# Allegro board autohood_teamschematic_v3.1.brd
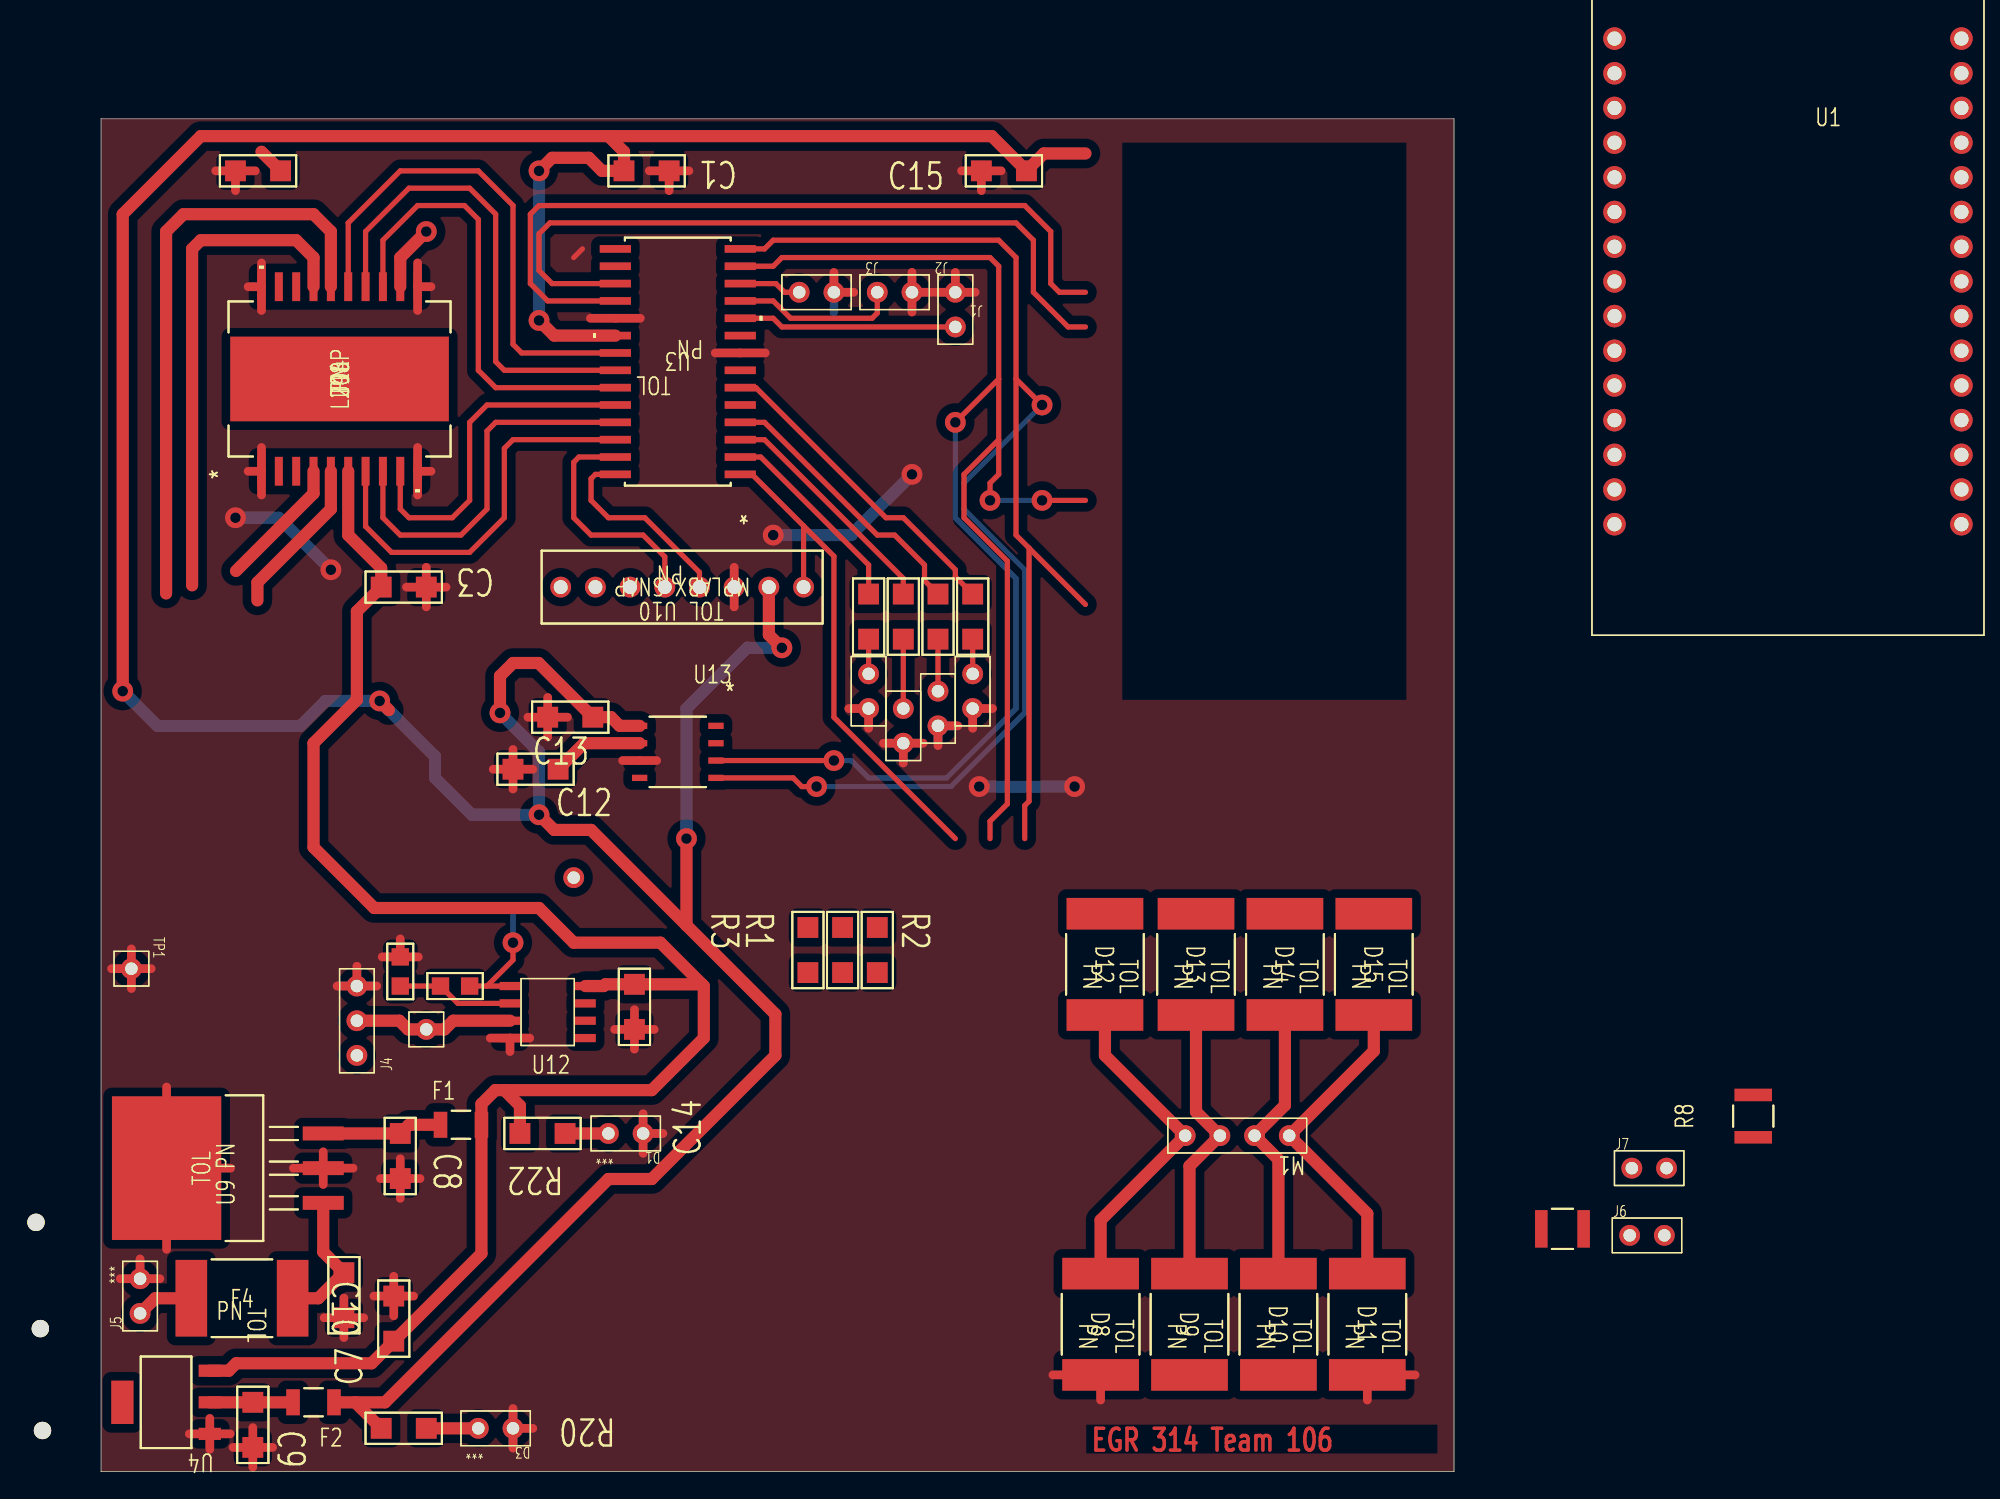
[diagram p0: board, top side]
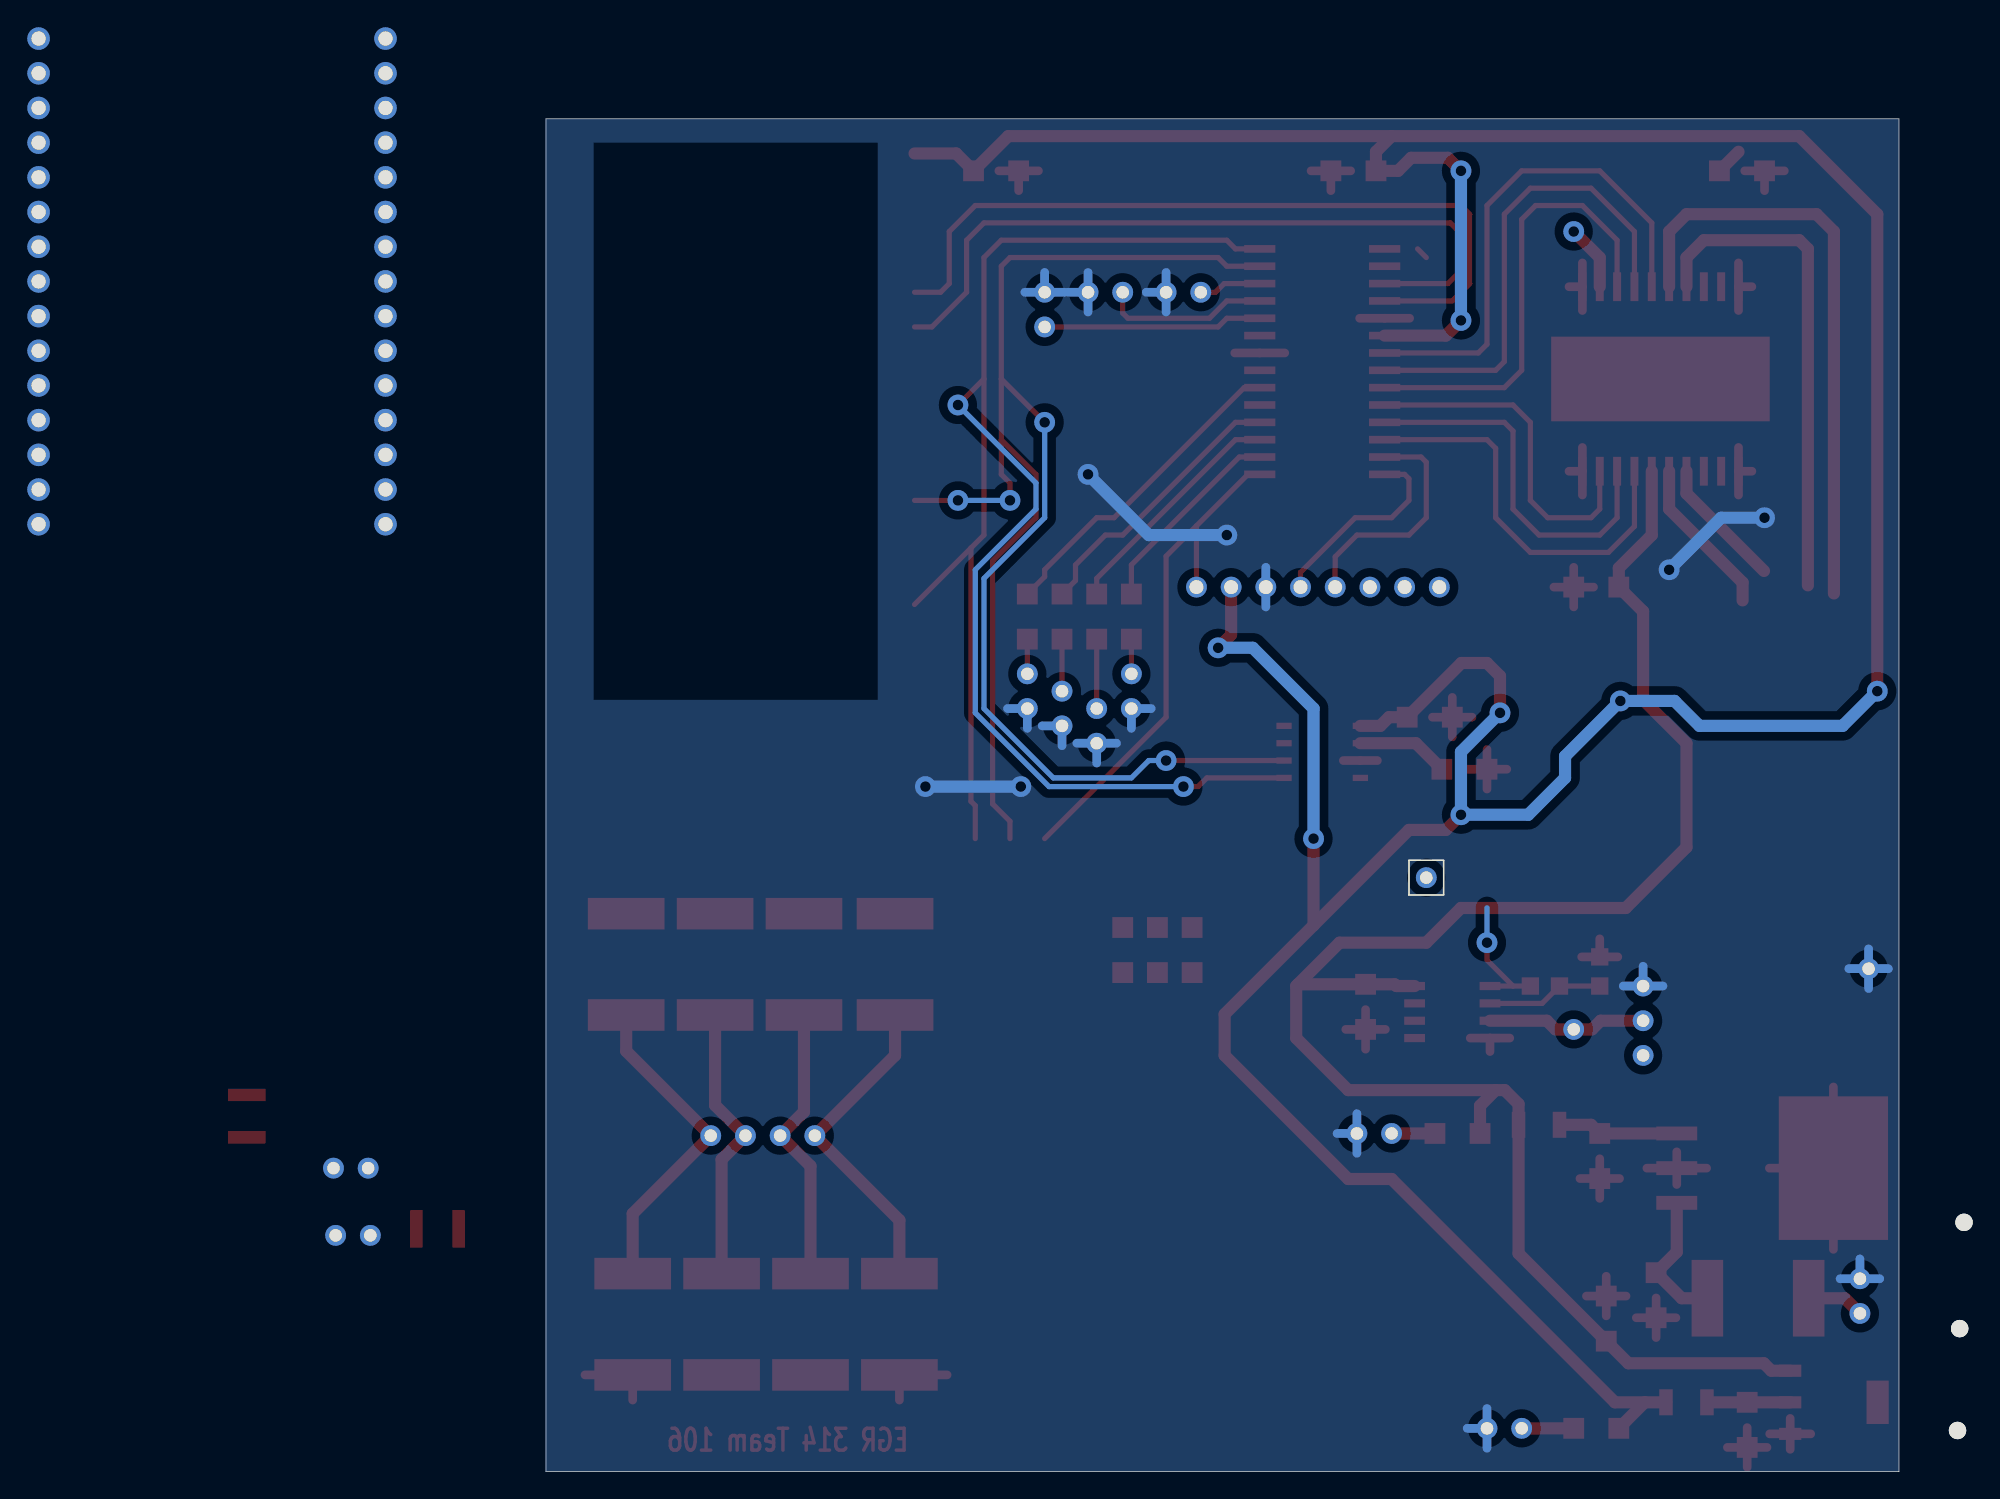
[diagram p1: board, bottom side, seen from below]

Outline 99.06 x 99.06 mm; copper layers: TOP, BOTTOM. Coordinates in mm from the lower left corner of the outline.
Outline path: 0,99.06 0,0 99.06,0 99.06,99.06 0,99.06

## Design rules (mm)
constraint set DEFAULT: min track width 0.127

## Placement (name value [footprint] x y rotation side)
C1  1 uF  [SMC1206]  41.59 95.25 180 top
C3  1 uF  [SMC1206]  23.81 64.77 180 top
C4  1 uF  [SMC1206]  9.84 95.25 0 top
C7  1 uF  [SMC1206]  17.78 11.27 90 top
C8  1 uF  [SMC1206]  21.91 24.76 270 top
C9  1 uF  [SMC1206]  11.11 5.08 270 top
C10  1 uF  [SMC1206]  21.43 12.86 270 top
C12  0.1uF  [SMC1206]  30.16 51.43 0 top
C13  0.22uF  [SMC1206]  32.7 55.24 0 top
C14  1 uF  [SMC1206]  39.05 32.38 90 top
C15  1 uF  [SMC1206]  64.45 95.25 0 top
D1  LED  [JUMPER2]  39.69 24.76 180 top
D2  LED  [JUMPER2]  63.82 55.88 90 top
D3  LED  [JUMPER2]  30.16 3.17 180 top
D4  LED  [JUMPER2]  56.2 55.88 90 top
D5  LED  [JUMPER2]  58.74 53.34 90 top
D7  LED  [JUMPER2]  61.28 54.61 90 top
D8  DIODE  [0ZCF_BEL]  73.18 10.79 270 top
D9  DIODE  [0ZCF_BEL]  79.69 10.79 270 top
D10  DIODE  [0ZCF_BEL]  86.2 10.79 270 top
D11  DIODE  [0ZCF_BEL]  92.71 10.79 270 top
D12  DIODE  [0ZCF_BEL]  73.5 37.15 270 top
D13  DIODE  [0ZCF_BEL]  80.17 37.15 270 top
D14  DIODE  [0ZCF_BEL]  86.68 37.15 270 top
D15  DIODE  [0ZCF_BEL]  93.19 37.15 270 top
F1  1.5A PTC Fuse  [0ZCJ_BEL]  26.35 25.4 0 top
F2  1.5A PTC Fuse  [0ZCJ_BEL]  15.56 5.08 0 top
F4  2.5A PTC Fuse  [0ZCF_BEL]  10.32 12.7 0 top
J1  CON2  [JUMPER2]  62.55 86.36 270 top
J2  CON2  [JUMPER2]  59.37 86.36 180 top
J3  CON2  [JUMPER2]  53.66 86.36 180 top
J4  CON3  [JUMPER3]  18.73 30.48 90 top
J5  CON2  [JUMPER2]  2.86 11.59 90 top
J6  Header to E-Button  [JUMPER2]  111.92 17.3 0 top
J7  Header to DEBUG-Button  [JUMPER2]  112.08 22.22 0 top
M1  42M100B  [JUMPER4]  87 24.61 180 top
NOREF  -  [unnamed]  -4.44 10.48 0 top
NOREF#2  -  [unnamed]  -4.76 18.26 0 top
NOREF#3  -  [unnamed]  -4.29 3.02 0 top
R1  10k Ohm  [SMC1206]  51.75 39.85 270 top
R2  4.7k Ohm  [SMC1206]  56.83 39.85 270 top
R3  4.7k Ohm  [SMC1206]  54.29 39.85 270 top
R8  10k Ohm  [RES_RN73R2E_KOA-M]  120.97 26.03 90 top
R10  220 Ohm  [SMC1206]  58.74 60.96 90 top
R11  100 Ohm  [SMC0805]  26.99 35.56 180 top
R12  51.1 Ohm  [SMC0805]  21.91 35.56 90 top
R17  220 Ohm  [SMC1206]  61.28 60.96 90 top
R18  220 Ohm  [SMC1206]  56.2 60.96 90 top
R19  220 Ohm  [SMC1206]  63.82 60.96 90 top
R20  220 Ohm  [SMC1206]  23.81 3.17 180 top
R22  220 Ohm  [SMC1206]  33.97 24.76 180 top
R23  10k Ohm  [RES_RN73R2E_KOA-M]  107 17.78 0 top
TP1  TEST POINT  [JUMPER1]  2.22 36.83 0 top
TP2  TEST POINT  [JUMPER1]  23.81 32.38 0 top
TP3  TEST POINT  [JUMPER1]  34.61 43.5 180 bottom
U1  ESP32 DEVKIT V1 - DOIT  [ESP32]  123.51 87.15 0 top
U3  PIC18LF26K40-E/SO  [SOIC28-W_MC_MCH-M]  42.23 81.28 180 top
U4  ADP3339AKCZ-3-3-RL  [SOT230P700X180-4N]  4.76 5.08 180 top
U9  LM340T-5/LF01  [SOT_0T-5P0LF01_TEX-M]  7.3 22.22 90 top
U10  MPLABX SNAP  [CONN_PXC08D_SUL]  51.44 63.5 180 top
U12  NCS21911  [NCS21912DR2G]  32.7 33.65 0 top
U13  HIH6130  [IC8_HIH6130-021-001_HNW]  42.23 52.7 0 top
U14  L298P  [POWERSO-20_STM-M]  17.46 80.01 90 top

## Library data of the parts
C1 C3 C4 C7-C10 C12-C15 = C
D1 D3 = LED: User Part Number: ***
D2 D4 D5 D7 = LED
D8-D15 = DIODE: User Part Number: PN; Tolerance: TOL
F1 F2 = FUSE THERMAL
F4 = FUSE THERMAL: User Part Number: PN; Tolerance: TOL
J1-J3 = CON2
J4 = CON3
J5 = CON2: User Part Number: ***
J6 J7 = HEADER 2
M1 = 42M100B
R1-R3 R8 R10-R12 R17-R20 R22 = R
R23 = RESISTOR
TP1-TP3 = TEST POINT
U1 = ESP32 DEVKIT V1 - DOIT
U3 = PIC18F26K40-E/SO: User Part Number: PN; Tolerance: TOL
U4 = ADP3339AKCZ
U9 = LM340T-5-LF01: User Part Number: PN; Tolerance: TOL
U10 = SNAP_CONNECTOR: User Part Number: PN; Tolerance: TOL
U12 = NCS21911
U13 = HIH6130
U14 = L298P: User Part Number: PN; Tolerance: TOL

## Footprints (pads in the part's own frame, mm; a bottom-side part is the same pattern mirrored in y, then rotated)
0ZCF_BEL
  rect 2.311x5.613 smd: 1(-3.708,0) 2(3.708,0)
0ZCJ_BEL
  rect 0.991x1.905 smd: 1(-1.499,0) 2(1.499,0)
CONN_PXC08D_SUL
  round 1.524 hole 1.016: 1(0,-1.27) 2(2.54,-1.27) 3(5.08,-1.27) 4(7.62,-1.27) 5(10.16,-1.27) 6(12.7,-1.27) 7(15.24,-1.27) 8(17.78,-1.27)
ESP32
  round 1.651 hole 1.041: 1(-12.7,17.78) 2(-12.7,15.24) 3(-12.7,12.7) 4(-12.7,10.16) 5(-12.7,7.62) 6(-12.7,5.08) 7(-12.7,2.54) 8(-12.7,0) 9(-12.7,-2.54) 10(-12.7,-5.08) 11(-12.7,-7.62) 12(-12.7,-10.16) 13(-12.7,-12.7) 14(-12.7,-15.24) 15(-12.7,-17.78) 16(12.7,17.78) 17(12.7,-15.24) 18(12.7,-12.7) 19(12.7,-10.16) 20(12.7,-7.62) 21(12.7,-5.08) 22(12.7,-2.54) 23(12.7,0) 24(12.7,2.54) 25(12.7,5.08) 26(12.7,7.62) 27(12.7,10.16) 28(12.7,12.7) 29(12.7,15.24) 30(12.7,-17.78)
IC8_HIH6130-021-001_HNW
  rect 1.118x0.457 smd: 1(-2.794,1.905) 2(-2.794,0.635) 3(-2.794,-0.635) 4(-2.794,-1.905) 5(2.794,-1.905) 6(2.794,-0.635) 7(2.794,0.635) 8(2.794,1.905)
JUMPER1
  round 1.524 hole 0.914: 1(0,0)
JUMPER2
  round 1.524 hole 0.914: 1(0,0) 2(2.54,0)
JUMPER3
  round 1.524 hole 0.914: 1(0,0) 2(2.54,0) 3(5.08,0)
JUMPER4
  round 1.524 hole 0.914: 1(0,0) 2(2.54,0) 3(5.08,0) 4(7.62,0)
NCS21912DR2G
  rect 1.52x0.6 smd: 1(-2.76,1.905) 2(-2.76,0.635) 3(-2.76,-0.635) 4(-2.76,-1.905) 5(2.76,-1.905) 6(2.76,-0.635) 7(2.76,0.635) 8(2.76,1.905)
POWERSO-20_STM-M
  rect 2.108x0.584 smd: 1(-6.756,5.715) 2(-6.756,4.445) 3(-6.756,3.175) 4(-6.756,1.905) 5(-6.756,0.635) 6(-6.756,-0.635) 7(-6.756,-1.905) 8(-6.756,-3.175) 9(-6.756,-4.445) 10(-6.756,-5.715) 11(6.756,-5.715) 12(6.756,-4.445) 13(6.756,-3.175) 14(6.756,-1.905) 15(6.756,-0.635) 16(6.756,0.635) 17(6.756,1.905) 18(6.756,3.175) 19(6.756,4.445) 20(6.756,5.715)
  rect 6.198x16.002 smd: 21(0,0)
RES_RN73R2E_KOA-M
  rect 0.914x2.743 smd: 1(-1.549,0) 2(1.549,0)
SMC0805
  rect 1.27x1.27 smd: 1(0,0) 2(2.134,0)
SMC1206
  rect 1.524x1.524 smd: 1(0,0) 2(3.302,0)
SOIC28-W_MC_MCH-M
  rect 2.286x0.559 smd: 1(-4.572,8.255) 2(-4.572,6.985) 3(-4.572,5.715) 4(-4.572,4.445) 5(-4.572,3.175) 6(-4.572,1.905) 7(-4.572,0.635) 8(-4.572,-0.635) 9(-4.572,-1.905) 10(-4.572,-3.175) 11(-4.572,-4.445) 12(-4.572,-5.715) 13(-4.572,-6.985) 14(-4.572,-8.255) 15(4.572,-8.255) 16(4.572,-6.985) 17(4.572,-5.715) 18(4.572,-4.445) 19(4.572,-3.175) 20(4.572,-1.905) 21(4.572,-0.635) 22(4.572,0.635) 23(4.572,1.905) 24(4.572,3.175) 25(4.572,4.445) 26(4.572,5.715) 27(4.572,6.985) 28(4.572,8.255)
SOT230P700X180-4N
  rect 1.626x0.889 smd: 1(-3.2,2.311) 2(-3.2,0) 3(-3.2,-2.311)
  rect 1.626x3.175 smd: 4(3.2,0)
SOT_0T-5P0LF01_TEX-M
  rect 1.016x2.997 smd: 1(-2.54,-8.966) 2(0,-8.966) 3(2.54,-8.966)
  rect 10.516x8.001 smd: 4(0,2.502)
unnamed
  round 1.27 hole 3.962 unplated: (0,0)

## Nets
3V3: C1.2 C13.2 C15.2 F2.2 J7.1 R1.2 R2.2 R3.2 R8.2 R20.2 R23.1 U1.1 U3.20 U10.2(VDD) U13.1
3V3_FUSE: C9.1 F2.1 U4.2(OUT1)
5V: C3.2 C4.2 C10.2 C14.2 D12.1(K) D13.1(K) D14.1(K) D15.1(K) F1.2 R22.2 U4.3 U12.8 U14.6 U14.12(VSS)
5V_FUSE: C8.1 F1.1 U9.3(OUT)
9V: C7.2 F4.2 J4.1 U9.1
GND: C1.1 C3.1 C4.1 C7.1 C8.2 C9.2 C10.1 C12.1 C13.1 C14.1 C15.1 D1.1(CATHODE) D2.1(CATHODE) D3.1(CATHODE) D4.1(CATHODE) D5.1(CATHODE) D7.1(CATHODE) D8.2 D9.2 D10.2 D11.2 J1.1 J2.1 J3.1 J4.3 J5.2 J6.2 R8.1 R12.2 TP1.1 U1.2 U1.17 U3.8 U3.19(VSS1) U4.1 U9.2 U9.4 U10.3 U12.4(VSS) U13.3(VSS) U14.1 U14.10 U14.11 U14.20
AMP: R11.1 TP3.1 U3.2 U12.1
ANEM: J4.2 TP2.1 U12.3
ANEM_LED: R10.2 U3.3
BTN_1: J7.2 U3.9
COIL_1_IN: D9.1(K) D13.2 M1.3 U14.4
COIL_1_OUT: D8.1(K) D12.2 M1.4(OUT_2) U14.5
COIL_2_IN: D11.1(K) D15.2 M1.1 U14.16
COIL_2_OUT: D10.1(K) D14.2 M1.2 U14.17
E-BUTTON: J6.1 R23.2 U3.15
ENABLEA: U3.25 U14.8
ENABLEB: U3.22 U14.14
ESP32RX: U1.6 U3.18
ESP32TX: U1.7 U3.17
HUMIDITY_LED: R17.2 U3.4
INPUT1A: U3.26 U14.7
INPUT1B: U3.23 U14.13
INPUT2A: U3.24 U14.9
INPUT2B: U3.21 U14.15
LED: R18.2 U3.7
MCLR: R1.1 U3.1 U10.1
PGC: U3.27 U10.5
PGD: U3.28 U10.4
SCL: R2.1 U1.14 U3.14 U13.5
SDA: R3.1 U1.11 U3.13 U13.6
STEP_LED: R19.2 U3.6
XTRAGPIO: J1.2 U3.10
XTRAGPIO1: J2.2 U3.11
XTRAGPIO2: J3.2 U3.12
N05422: D2.2 R19.1
N05426: D3.2 R20.1
N06741: D4.2 R18.1
N07629: F4.1 J5.1
N08087: D5.2 R10.1
N08305: R11.2 R12.1 U12.2
N08985: C12.2 U13.2
N09403: D7.2 R17.1
N39972: D1.2 R22.1

Pads without a net: U1 3 4 5 8 9 10 12 13 15 16 18 19 20 21 22 23 24 25 26 27 28 29 30; U3 5 16; U4 4; U10 6 7 8; U12 5 6 7; U13 4 7 8; U14 2 3 18 19 21

## Via types
v1: diameter 1.524, hole 0.775, TOP to BOTTOM, 22 vias

## Routing (per net, layer and track width the routed paths; a pad name or vN(x,y) marks a point on that pad's centre or on a via; arc(x,y) is an arc through that point)
3V3: length 299.3
  TOP w0.889: 42.86,40 35.88,46.99 33.18,46.99 v1(32.07,48.1) ; 42.86,40 v1(42.86,46.35) ; 42.86,40 49.37,33.5 49.37,30.48 40.32,21.43 37.15,21.43 20.8,5.08 18.61,5.08 ; 72.07,96.52 69.02,96.52 C15.2 65.21,97.79 37.15,97.79 ; 18.61,5.08 F2.2 ; 18.61,5.08 R20.2 ; 37.15,97.79 7.3,97.79 1.59,92.07 v1(1.59,57.15) ; 37.15,97.79 38.29,96.65 C1.2 36.67,95.25 35.72,96.2 33.02,96.2 v1(32.07,95.25) ; U3.20 33.18,83.18 v1(32.07,84.3) ; v1(49.85,60.32) 48.89,61.28 U10.2 ; 21.07,55.77 v1(20.4,56.44) ; v1(29.21,55.56) 29.21,58.26 30.16,59.21 32.04,59.21 C13.2 37.34,55.24 37.97,54.61 39.43,54.61
  BOTTOM w0.889: v1(1.59,57.15) 4.13,54.61 14.61,54.61 16.43,56.44 v1(20.4,56.44) 24.45,52.39 24.45,50.8 27.15,48.1 v1(32.07,48.1) 32.07,52.7 v1(29.21,55.56) ; v1(32.07,95.25) v1(32.07,84.3) ; v1(42.86,46.35) 42.86,55.88 47.31,60.32 v1(49.85,60.32)
3V3_FUSE: length 6.1
  TOP w0.889: U4.2 C9.1 F2.1
5V: length 138.9
  TOP w0.889: 29.53,27.94 40.32,27.94 44.13,31.75 44.13,35.56 44.01,35.69 ; 29.53,27.94 30.67,26.8 R22.2 ; 29.53,27.94 28.87,27.94 27.85,26.92 F1.2 27.85,15.98 C10.2 19.81,7.94 9.89,7.94 9.35,7.39 U4.3 ; v1(23.81,90.8) 21.91,88.9 U14.12 ; C4.2 11.75,96.65 ; 44.01,35.69 C14.2 36.92,35.69 36.79,35.56 U12.8 ; 44.01,35.69 40.96,38.73 34.61,38.73 32.07,41.27 20,41.27 15.56,45.72 15.56,53.34 18.73,56.51 18.73,62.99 C3.2 20.51,66.17 18.1,68.58 U14.6
5V_FUSE: length 8.8
  TOP w0.889: U9.3 C8.1 22.54,25.4 F1.1
9V: length 10.3
  TOP w0.889: U9.1 16.27,16.08 C7.2 15.91,12.7 F4.2
GND: length 265.4
  TOP w0.381: 34.61,88.9 35.24,89.53
  TOP w0.635: 46.36,63.32 U10.3 46.36,66.22 ; 56.2,54.43 D4.1 54.75,55.88 ; U9.4 4.8,28.17 ; U9.4 9.49,22.22 ; U9.4 4.8,16.28 ; C13.1 34.15,55.24 ; C13.1 31.25,55.24 ; C13.1 32.7,56.69 ; C13.1 32.7,53.8 ; C7.1 17.78,12.72 ; C7.1 19.23,11.27 ; C7.1 16.33,11.27 ; C7.1 17.78,9.82 ; 1.41,14.13 J5.2 ; J5.2 2.86,15.58 ; J5.2 4.31,14.13 ; 28.5,31.75 U12.4 ; U12.4 29.94,30.76 ; U12.4 31.39,31.75 ; 22.36,64.77 C3.1 ; C3.1 23.81,63.32 ; C3.1 23.81,66.22 ; C3.1 25.26,64.77 ; 39.69,23.32 D1.1 ; D1.1 39.69,26.21 ; D1.1 41.14,24.76 ; 23.18,85.03 U14.11 ; U14.11 23.18,88.51 ; U14.11 24.16,86.77 ; J4.3 18.73,37.01 ; J4.3 17.28,35.56 ; J4.3 20.18,35.56 ; C12.1 31.61,51.43 ; C12.1 30.16,52.88 ; C12.1 28.71,51.43 ; C12.1 30.16,49.99 ; 53.66,87.81 J3.1 55.11,86.36 ; 21.91,20.01 C8.2 ; C8.2 23.36,21.46 ; C8.2 20.46,21.46 ; C8.2 21.91,22.91 ; D5.1 60.19,53.34 ; D5.1 58.74,51.89 ; D5.1 57.29,53.34 ; 39.05,30.94 C14.1 ; C14.1 40.5,32.38 ; C14.1 39.05,33.83 ; C14.1 37.6,32.38 ; 0.77,36.83 TP1.1 ; TP1.1 3.67,36.83 ; TP1.1 2.22,35.38 ; TP1.1 2.22,38.28 ; 64.45,93.8 C15.1 ; C15.1 63,95.25 ; C15.1 65.9,95.25 ; 23.18,71.51 U14.10 ; U14.10 23.18,74.99 ; U14.10 24.16,73.25 ; 11.11,0.33 C9.2 ; C9.2 9.66,1.78 ; C9.2 11.11,3.23 ; C9.2 12.56,1.78 ; R12.2 21.91,39.01 ; R12.2 20.59,37.69 ; R12.2 23.23,37.69 ; 92.71,5.24 D11.2 96.2,7.09 ; D3.1 30.16,4.62 ; D3.1 31.61,3.17 ; D3.1 30.16,1.73 ; 65.27,55.88 D2.1 63.82,54.43 ; U9.2 18.45,22.22 ; U9.2 16.27,21.03 ; U9.2 16.27,23.42 ; U9.2 14.08,22.22 ; 21.43,11.41 C10.1 ; C10.1 21.43,14.31 ; C10.1 19.98,12.86 ; C10.1 22.88,12.86 ; 35.83,84.45 U3.19 39.48,84.45 ; 40.14,95.25 C1.1 ; C1.1 43.04,95.25 ; C1.1 41.59,93.8 ; 11.75,71.51 U14.1 ; U14.1 11.75,74.99 ; U14.1 10.77,73.25 ; U14.20 11.75,88.51 ; U14.20 11.75,85.03 ; U14.20 10.77,86.77 ; 59.37,84.91 J2.1 ; J2.1 59.37,87.81 ; J2.1 60.82,86.36 ; C4.1 11.29,95.25 ; C4.1 9.84,93.8 ; C4.1 8.39,95.25 ; J1.1 62.55,87.81 ; J1.1 64,86.36 ; J1.1 61.1,86.36 ; 69.69,7.09 D8.2 73.18,5.24 ; U4.1 9.46,2.77 ; U4.1 7.96,3.9 ; U4.1 6.46,2.77 ; U4.1 7.96,1.64 ; 38.19,52.07 40.68,52.07 ; 62.73,54.61 D7.1 61.28,53.16 ; 48.63,81.91 U3.8 44.97,81.91
  BOTTOM w0.635: 0.77,36.83 TP1.1 ; TP1.1 2.22,35.38 ; TP1.1 2.22,38.28 ; TP1.1 3.67,36.83 ; 65.27,55.88 D2.1 63.82,54.43 ; 58.74,51.89 D5.1 ; D5.1 57.29,53.34 ; D5.1 60.19,53.34 ; J5.2 2.86,15.58 ; J5.2 4.31,14.13 ; J5.2 1.41,14.13 ; 61.28,53.16 D7.1 62.73,54.61 ; J2.1 60.82,86.36 ; J2.1 59.37,87.81 ; J2.1 59.37,84.91 ; 30.16,1.73 D3.1 ; D3.1 30.16,4.62 ; D3.1 31.61,3.17 ; 39.69,23.32 D1.1 ; D1.1 41.14,24.76 ; D1.1 39.69,26.21 ; J1.1 62.55,87.81 ; J1.1 61.1,86.36 ; J1.1 64,86.36 ; J4.3 20.18,35.56 ; J4.3 18.73,37.01 ; J4.3 17.28,35.56 ; J3.1 55.11,86.36 ; J3.1 53.66,84.91 ; J3.1 53.66,87.81 ; 46.36,66.22 U10.3 46.36,63.32 ; 54.75,55.88 D4.1 56.2,54.43
  BOTTOM w0.889: v1(9.84,69.85) 13.02,69.85 v1(16.83,66.04) ; v1(59.37,73.02) 54.93,68.58 v1(49.21,68.58) ; v1(64.29,50.16) v1(71.28,50.16)
AMP: length 9.5
  TOP w0.381: U12.1 28.26,35.56 ; 28.26,35.56 R11.1 ; 28.26,35.56 30.16,37.46 v1(30.16,38.73)
  BOTTOM w0.381: v1(30.16,38.73) 30.16,41.27
ANEM: length 11.7
  TOP w0.889: J4.2 21.84,33.02 22.48,32.38 TP2.1 25.15,32.38 25.78,33.02 U12.3
ANEM_LED: length 17.3
  TOP w0.381: R10.2 58.74,65.4 48.58,75.56 U3.3
COIL_1_IN: length 30.2
  TOP w0.889: D9.1 79.69,22.38 M1.3 80.17,26.35 D13.2 ; 9.88,65.95 15.56,71.63 U14.4
COIL_1_OUT: length 35.6
  TOP w0.889: U14.5 16.83,70.48 11.45,65.11 11.45,63.8 ; D8.1 73.18,18.41 M1.4 73.5,30.48 D12.2
COIL_2_IN: length 67.5
  TOP w0.889: D11.1 92.71,18.89 M1.1 93.19,30.8 D15.2 ; U14.16 16.83,90.8 15.56,92.07 6.03,92.07 4.76,90.8 4.76,64.31
COIL_2_OUT: length 57
  TOP w0.889: D10.1 86.2,22.86 M1.2 86.68,26.83 D14.2 ; 6.67,64.9 6.67,89.53 7.3,90.17 14.29,90.17 15.56,88.9 U14.17
ENABLEA: length 27.7
  TOP w0.381: U3.25 28.89,76.83 28.26,76.2 28.26,70.48 26.35,68.58 21.91,68.58 20.64,69.85 U14.8
ENABLEB: length 35.5
  TOP w0.381: U14.14 19.37,90.8 22.54,93.98 26.99,93.98 28.89,92.07 28.89,81.28 29.53,80.64 U3.22
ESP32RX: length 57.6
  TOP w0.381: U3.18 32.7,85.72 31.43,86.99 31.43,92.07 32.07,92.71 67.63,92.71 69.53,90.8 69.53,86.99 70.17,86.36 72.07,86.36
ESP32TX: length 54.4
  TOP w0.381: U3.17 33.02,86.99 32.07,87.95 32.07,90.65 32.86,91.44 66.99,91.44 68.26,90.17 68.26,86.36 70.8,83.82 72.07,83.82
HUMIDITY_LED: length 20.4
  TOP w0.381: U3.4 48.58,76.83 56.83,68.58 58.1,68.58 60.29,66.39 60.29,65.25 R17.2
INPUT1A: length 29.5
  TOP w0.381: U14.7 19.37,69.21 21.27,67.31 26.99,67.31 29.53,69.85 29.53,74.93 30.16,75.56 U3.26
INPUT1B: length 33.5
  TOP w0.381: U14.13 20.64,90.17 23.18,92.71 26.61,92.71 27.62,91.69 27.62,80.64 28.89,79.38 U3.23
INPUT2A: length 25.5
  TOP w0.381: U14.9 21.91,70.48 22.54,69.85 25.72,69.85 26.99,71.12 26.99,76.83 28.26,78.1 U3.24
INPUT2B: length 37.3
  TOP w0.381: U3.21 30.8,81.91 30.16,82.55 30.16,92.71 27.62,95.25 21.91,95.25 18.1,91.44 U14.15
LED: length 14.8
  TOP w0.381: R18.2 56.2,66.4 48.3,74.29 46.8,74.29
MCLR: length 38.2
  TOP w0.381: 51.44,69.25 47.66,73.02 U3.1 ; 51.44,69.25 53.66,67.03 53.66,55.24 62.55,46.35 ; 51.44,69.25 U10.1
PGC: length 17.3
  TOP w0.381: U3.27 34.99,74.29 34.61,73.91 34.61,69.85 35.88,68.58 39.69,68.58 41.28,66.99 U10.5
PGD: length 14.7
  TOP w0.381: U10.4 43.81,65.85 39.81,69.85 37.15,69.85 35.88,71.12 35.88,72.71 36.19,73.02 U3.28
SCL: length 124.4
  TOP w0.381: 67.94,67.63 67.94,49.09 67.63,48.77 67.63,46.35 ; 67.94,67.63 72.07,63.5 ; 67.94,67.63 66.99,68.58 66.99,80.01 ; v1(68.9,78.1) 66.99,80.01 ; 66.99,80.01 66.99,88.9 65.72,90.17 49.21,90.17 48.58,89.53 U3.14 ; U13.5 50.67,50.8 51.31,50.16 v1(52.39,50.16)
  BOTTOM w0.381: v1(68.9,78.1) 63.18,72.39 63.18,70.48 67.63,66.04 67.63,55.56 62.23,50.16 v1(52.39,50.16)
SDA: length 127.8
  TOP w0.381: 65.72,75.56 65.72,80.01 ; 65.72,75.56 65.72,73.02 65.09,72.39 v1(65.09,71.12) ; 65.72,75.56 63.18,73.02 63.18,69.85 66.36,66.67 66.36,48.89 65.09,47.62 65.09,46.35 ; 65.72,80.01 v1(62.55,76.83) ; 65.72,80.01 65.72,88.26 65.09,88.9 49.85,88.9 49.21,88.26 U3.13 ; 72.07,71.12 v1(68.9,71.12) ; U13.6 v1(53.66,52.07)
  BOTTOM w0.381: v1(53.66,52.07) 54.93,52.07 56.2,50.8 61.91,50.8 66.99,55.88 66.99,65.4 62.55,69.85 v1(62.55,76.83) ; v1(68.9,71.12) v1(65.09,71.12)
STEP_LED: length 23.6
  TOP w0.381: R19.2 62.55,65.53 62.55,66.04 58.74,69.85 57.47,69.85 47.94,79.38 U3.6
XTRAGPIO: length 16
  TOP w0.381: J1.2 49.85,83.82 49.21,84.45 U3.10
XTRAGPIO1: length 12.2
  TOP w0.381: U3.11 49.21,85.72 50.48,84.45 56.45,84.45 56.83,84.84 J2.2
XTRAGPIO2: length 4.6
  TOP w0.381: J3.2 50.04,86.36 49.4,86.99 U3.12
N05422: length 2.5
  TOP w0.381: D2.2 R19.1
N05426: length 3.8
  TOP w0.889: D3.2 R20.1
N06741: length 2.5
  TOP w0.381: R18.1 D4.2
N07629: length 4.2
  TOP w0.889: F4.1 3.97,12.7 J5.1
N08087: length 5.1
  TOP w0.381: D5.2 R10.1
N08305: length 8.6
  TOP w0.381: U12.2 26.12,34.29 R11.2 R12.1
N08985: length 6.8
  TOP w0.889: C12.2 35.37,53.34 39.43,53.34
N09403: length 3.8
  TOP w0.381: D7.2 R17.1
N39972: length 3.2
  TOP w0.889: D1.2 R22.1

## Copper pours and planes (outline as drawn; the poured copper is in the pictures)
GND on TOP: 99.06,0 99.06,99.06 0,99.06 0,0 ; 1 cut-out
GND on BOTTOM: 0,99.06 0,0 99.06,0 99.06,99.06 ; 1 cut-out

## Text on the board
TOP: EGR 314 Team 106
